# EAGLE board untitled (EAGLE 6.4)
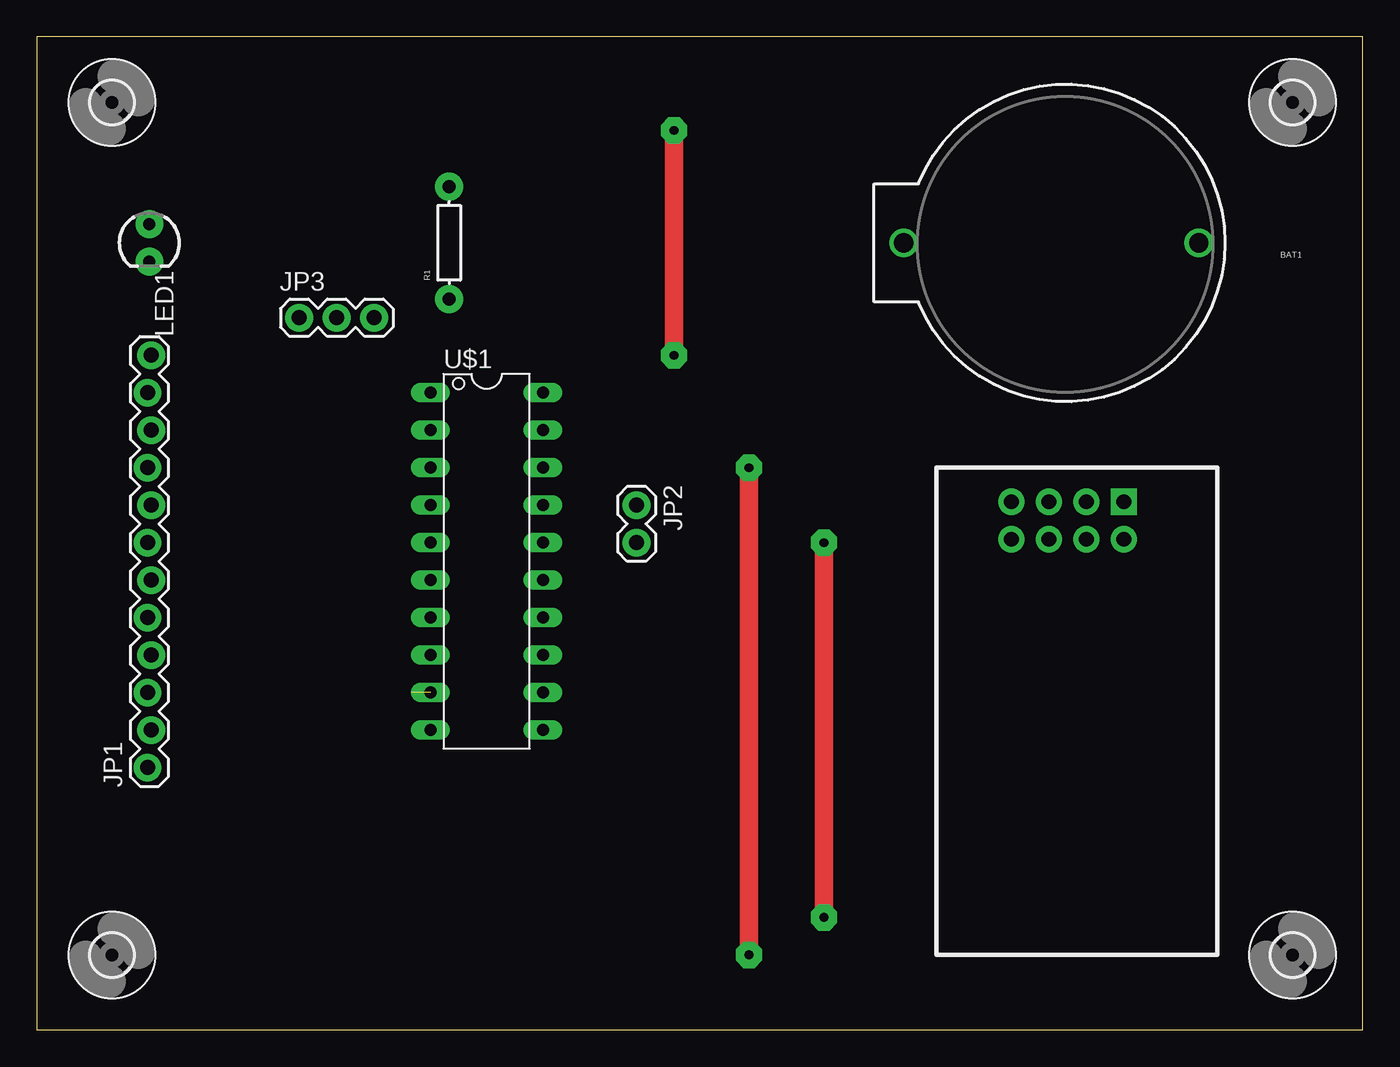
[diagram p0: board, top side]
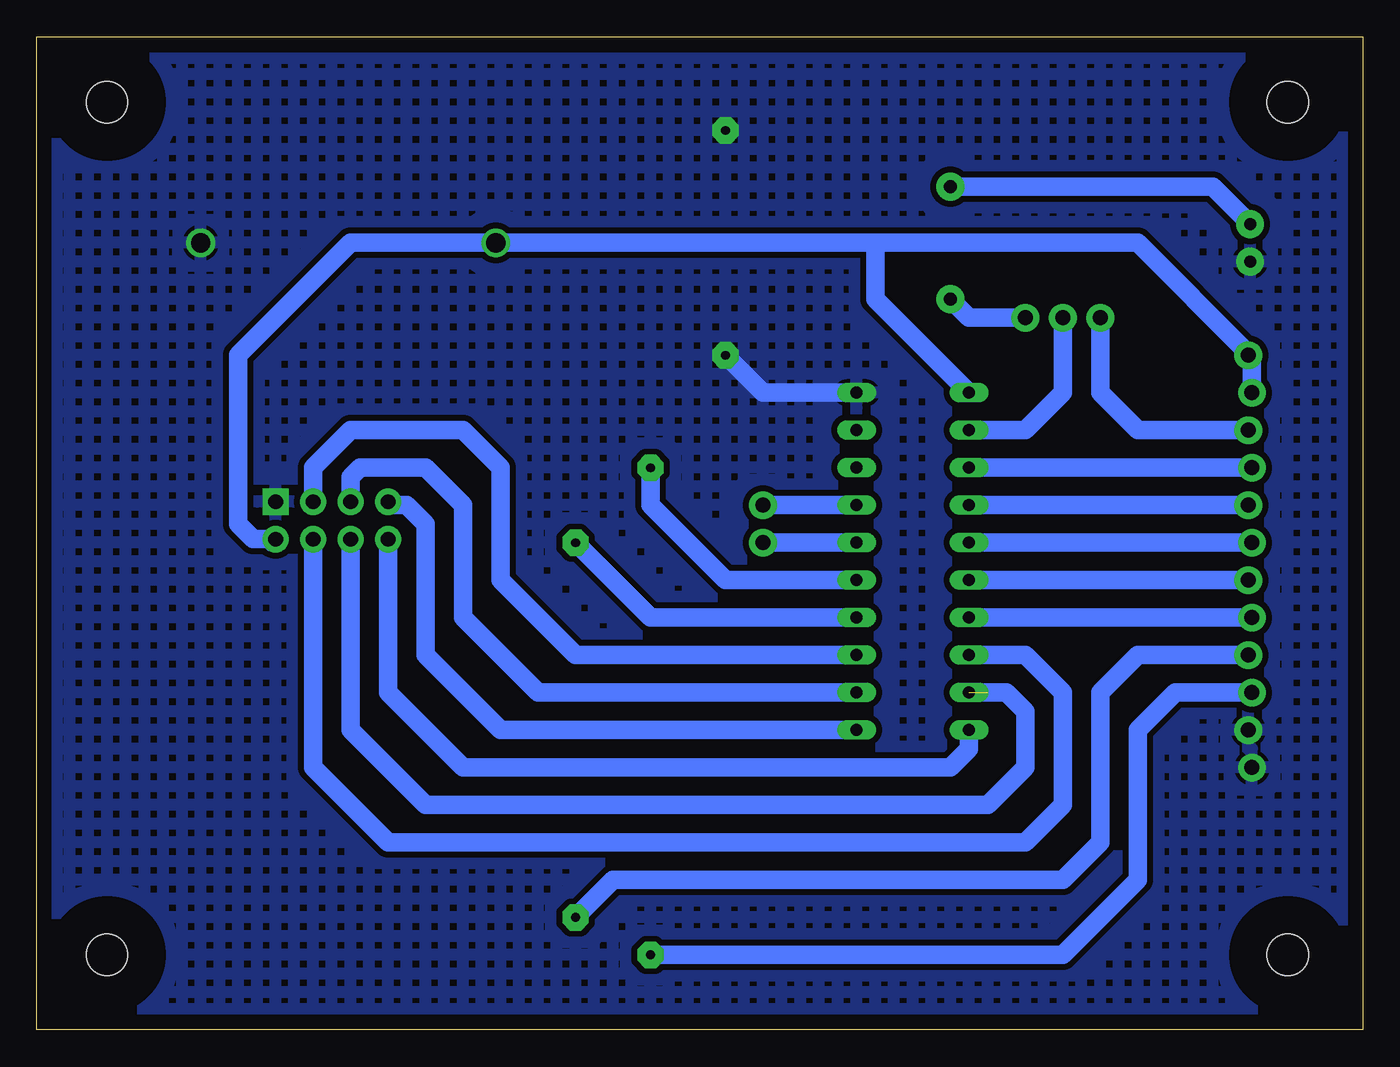
[diagram p1: board, bottom side, seen from below]

Size 89.84 x 67.3 mm. Coordinates in mm from the lower left corner, seen from the top.
Outline: 0,0 89.84,0 89.84,67.3 0,67.3 0,0
Copper layers (1*16): Top 0.035mm / dielectric 1.5mm / Bottom 0.035mm
Design rules "default": minimum track width 10mil, minimum drill 24mil, track to track 8mil, track to pad 8mil, pad to pad 8mil, via to via 8mil, smd to smd 8mil, copper to edge 40mil, drill to drill 8mil, minimum pad ring 10mil, minimum via ring 8mil, stop-mask expansion 4mil, vias tented up to drill 0mil, thermal gap 10mil

## Footprints (pad centres in the part's own frame; a part is rotated, then mirrored left to right if it is on the bottom)
BATTCOM_20MM_PTH = drill 1.3: 1 20,0; 2 0,0
1X12_LOCK = drill 1.016 pad 1.88: 1 0,0.127; 2 2.54,-0.127; 3 5.08,0.127; 4 7.62,-0.127; 5 10.16,0.127; 6 12.7,-0.127; 7 15.24,0.127; 8 17.78,-0.127; 9 20.32,0.127; 10 22.86,-0.127; 11 25.4,0.127; 12 27.94,-0.127
1X02 = drill 1.016 pad 1.88: 1 0,0; 2 2.54,0
1X03 = drill 1.016 pad 1.88: 1 0,0; 2 2.54,0; 3 5.08,0
LED3MM = drill 0.813 pad 1.88: A -1.27,0; K 1.27,0
AXIAL-0.3 = drill 0.9 pad 1.88: P$1 -3.81,0; P$2 3.81,0
NRF24L01-4X2 = drill 1 pad 1.778 square: 1 -11.67,3.81 | drill 1 pad 1.778: 2 -9.13,3.81; 3 -11.67,1.27; 4 -9.13,1.27; 5 -11.67,-1.27; 6 -9.13,-1.27; 7 -11.67,-3.81; 8 -9.13,-3.81
N20 = drill 0.813 long: 1 -11.435,-3.81; 2 -8.895,-3.81; 3 -6.355,-3.81; 4 -3.815,-3.81; 5 -1.275,-3.81; 6 1.265,-3.81; 7 3.805,-3.81; 8 6.345,-3.81; 9 8.885,-3.81; 10 11.425,-3.81; 11 11.425,3.81; 12 8.885,3.81; 13 6.345,3.81; 14 3.805,3.81; 15 1.265,3.81; 16 -1.275,3.81; 17 -3.815,3.81; 18 -6.355,3.81; 19 -8.895,3.81; 20 -11.435,3.81
2,8 = hole 2.8: 0,0

## Placement (x,y rotation side)
BAT1  [BATTCOM_20MM_PTH]  78.74,53.34 180 top
JP1  M12LOCK  [1X12_LOCK]  7.62,17.78 90 top
JP2  [1X02]  40.64,35.56 270 top
JP3  [1X03]  17.78,48.26 0 top
LED1  [LED3MM]  7.62,53.34 270 top
R1  [AXIAL-0.3]  27.94,53.34 90 top
U1  NRF24L01-4X2  [NRF24L01-4X2]  69.85,24.13 270 top
U$1  G2X[0/3]2---N20  [N20]  30.48,31.75 270 top
U$2  [2,8]  5.08,5.08 0 top
U$3  [2,8]  85.09,5.08 0 top
U$4  [2,8]  85.09,62.87 0 top
U$5  [2,8]  5.08,62.87 0 top

## Library data of the parts
BAT1 = SparkFun-Electromechanical
JP1-JP3 = SparkFun-Connectors
LED1 = SparkFun-LED
R1 = SparkFun-Passives
U1 = untitled
U$1 = TI_MSP430_v16
U$2-U$5 = holes

## Nets
GND: BAT1.2 JP1.1 JP1.2 LED1.K U1.1 U$1.20
N$1: U1.3 U$1.13
N$2: U1.8 U$1.10
N$3: U1.7 U$1.11
N$4: U1.5 U$1.12
N$5: JP1.4 U$1.14
N$6: JP1.3 U$1.15
N$7: JP1.6 U$1.6
N$8: JP1.7 U$1.5
N$9: JP1.8 U$1.4
N$10: JP1.9 U$1.3
N$11: JP3.2 U$1.2
N$12: JP1.5 U$1.7
N$13: JP2.2 U$1.16
N$14: JP2.1 U$1.17
N$15: JP3.3 R1.P$1
N$16: JP1.10 JP3.1
N$17: U1.6 U$1.9
N$18: U1.4 U$1.8
N$19: LED1.A R1.P$2
VCC: BAT1.1 JP1.11 JP1.12 U1.2 U$1.1

## Tracks (layer width: path | path; a pad name or v marks a point on that pad's centre or on a via)
GND  (via drill 0.6 pad 1.78)
  Top 1.27: v43.18,60.96 v43.18,45.72
  Bottom 1.27: v43.18,45.72 40.65,43.19 U$1.20
  pour Bottom (isolate 0.406, rank 3, hatched): 88.9,66.04 0,66.04 0,0 88.9,0
N$1
  Bottom 0.406: U$1.13
  Bottom 1.27: U$1.13 53.34,25.41 58.42,30.48 58.42,38.1 60.96,40.64 68.58,40.64 71.12,38.1 U1.3
N$2
  Bottom 1.27: U1.8 66.04,22.86 60.96,17.78 27.94,17.78 26.67,19.05 U$1.10
N$3
  Bottom 0.406: U$1.11
  Bottom 1.27: U$1.11 58.42,20.32 63.5,25.4 63.5,34.29 64.77,35.56 65.8,35.56 U1.7
N$4
  Bottom 1.27: U$1.12 55.88,22.86 60.96,27.94 60.96,35.56 63.5,38.1 67.94,38.1 68.58,37.47 U1.5
N$5  (via drill 0.6 pad 1.78)
  Top 1.27: v53.34,33.02 v53.34,7.62
  Bottom 1.27: U$1.14 45.72,27.95 45.72,27.94 48.26,27.94 v53.34,33.02 | 7.62,25.4 JP1.4 15.24,25.4 17.78,22.86 17.78,12.7 20.32,10.16 50.8,10.16 v53.34,7.62
N$6  (via drill 0.6 pad 1.78)
  Top 1.27: v48.26,38.1 v48.26,5.08
  Bottom 1.27: U$1.15 43.19,30.48 48.26,35.56 v48.26,38.1 | v48.26,5.08 20.32,5.08 15.24,10.16 15.24,20.32 12.7,22.86 JP1.3
N$7
  Bottom 0.406: JP1.6
  Bottom 1.27: JP1.6 U$1.6
N$8
  Bottom 0.406: U$1.5
  Bottom 1.27: U$1.5 JP1.7
N$9
  Bottom 0.406: JP1.8
  Bottom 1.27: JP1.8 U$1.4
N$10
  Bottom 0.406: U$1.3
  Bottom 1.27: U$1.3 JP1.9
N$11
  Bottom 1.27: U$1.2 22.86,40.64 20.32,43.18 JP3.2
N$12
  Bottom 0.406: U$1.7
  Bottom 1.27: U$1.7 JP1.5
N$13
  Bottom 1.27: U$1.16 JP2.2
N$14
  Bottom 1.27: JP2.1 arc-90 JP2.1 | U$1.17 JP2.1
N$15
  Bottom 1.27: JP3.3 26.67,48.26 R1.P$1
N$16
  Bottom 1.27: JP3.1 17.78,43.18 15.24,40.64 JP1.10
N$17  (1 unrouted)
  Bottom 1.27: U$1.9 24.14,22.86 22.86,21.59 22.86,17.78 25.4,15.24 63.5,15.24 68.58,20.32 U1.6 | 25.41,22.86
N$18
  Bottom 1.27: U$1.8 22.86,25.41 20.32,22.86 20.32,15.24 22.86,12.7 66.04,12.7 71.12,17.78 U1.4
N$19
  Bottom 1.27: R1.P$2 10.16,57.15 LED1.A
VCC
  Bottom 0.406: U$1.1 | JP1.12 7.49,45.47
  Bottom 1.27: 7.49,45.47 JP1.11 | 73.9,33.02 U1.2 75.17,33.26 76.2,34.29 76.2,45.72 68.58,53.34 BAT1.1 33.02,53.34 | U$1.1 33.02,49.53 33.02,53.34 | 33.02,53.34 15.24,53.34 7.75,45.85 JP1.12

## Text on the board
_tNames: BAT1 | LED1 | R1 | JP3 | U$1 | JP2 | JP1